# Altium PCB electrodes_only.PcbDoc
Units mm, origin at the board's own origin, x right, y up, seen from the top; angles counter-clockwise.
Board outline 42 x 42 mm, 3 copper layers (Layer 1, Layer 3, Layer 2), stack 1.975 mm thick; 1 components, 45 nets, 5 pads, 0 vias.
Unrouted connection lines stored in the file: 50.
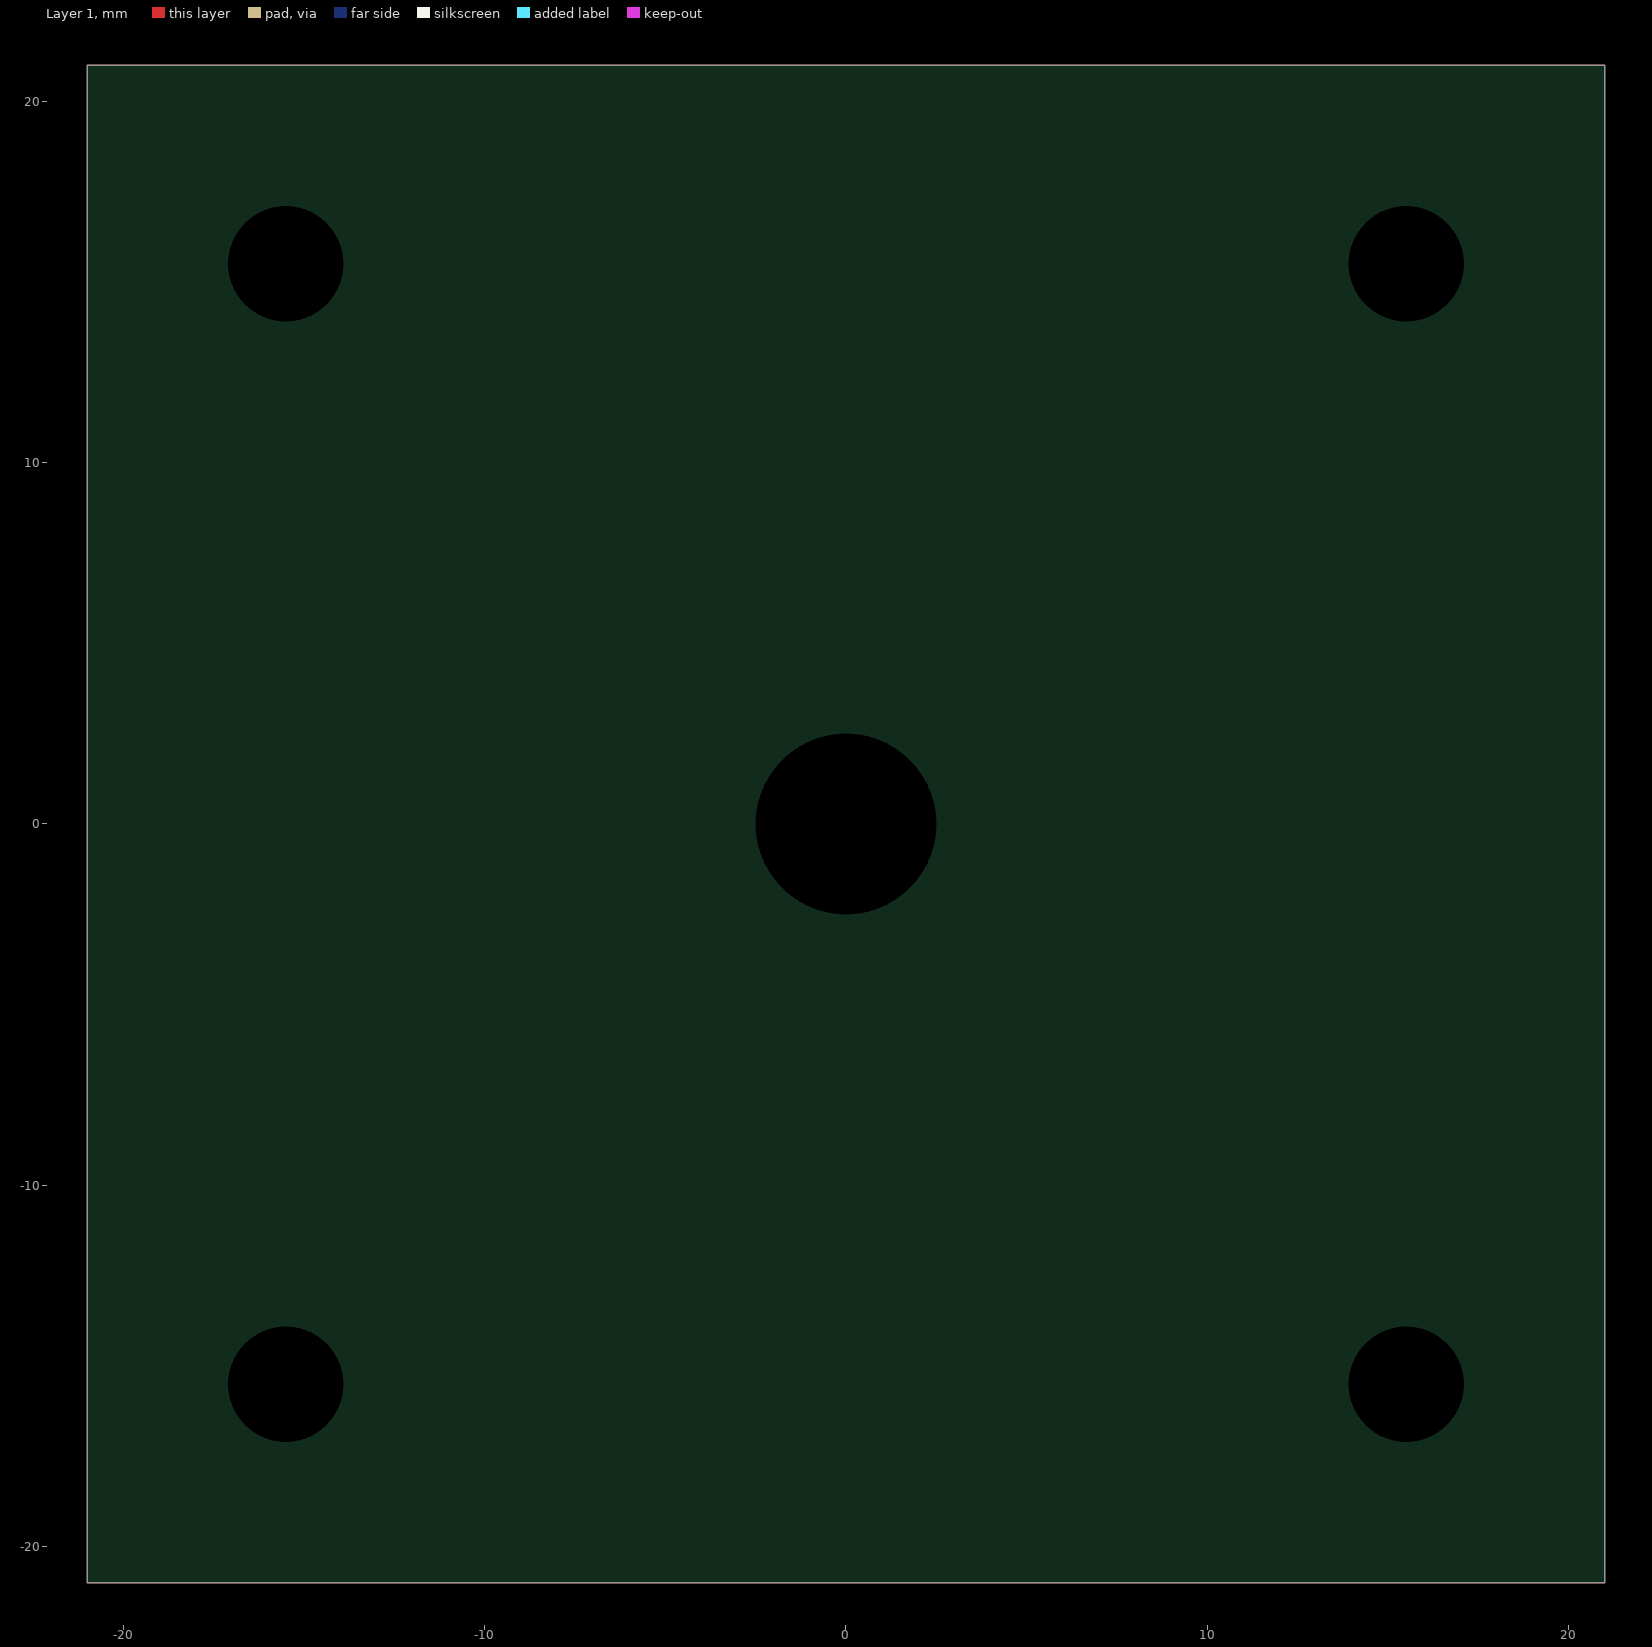
[diagram p0: Layer 1 view]
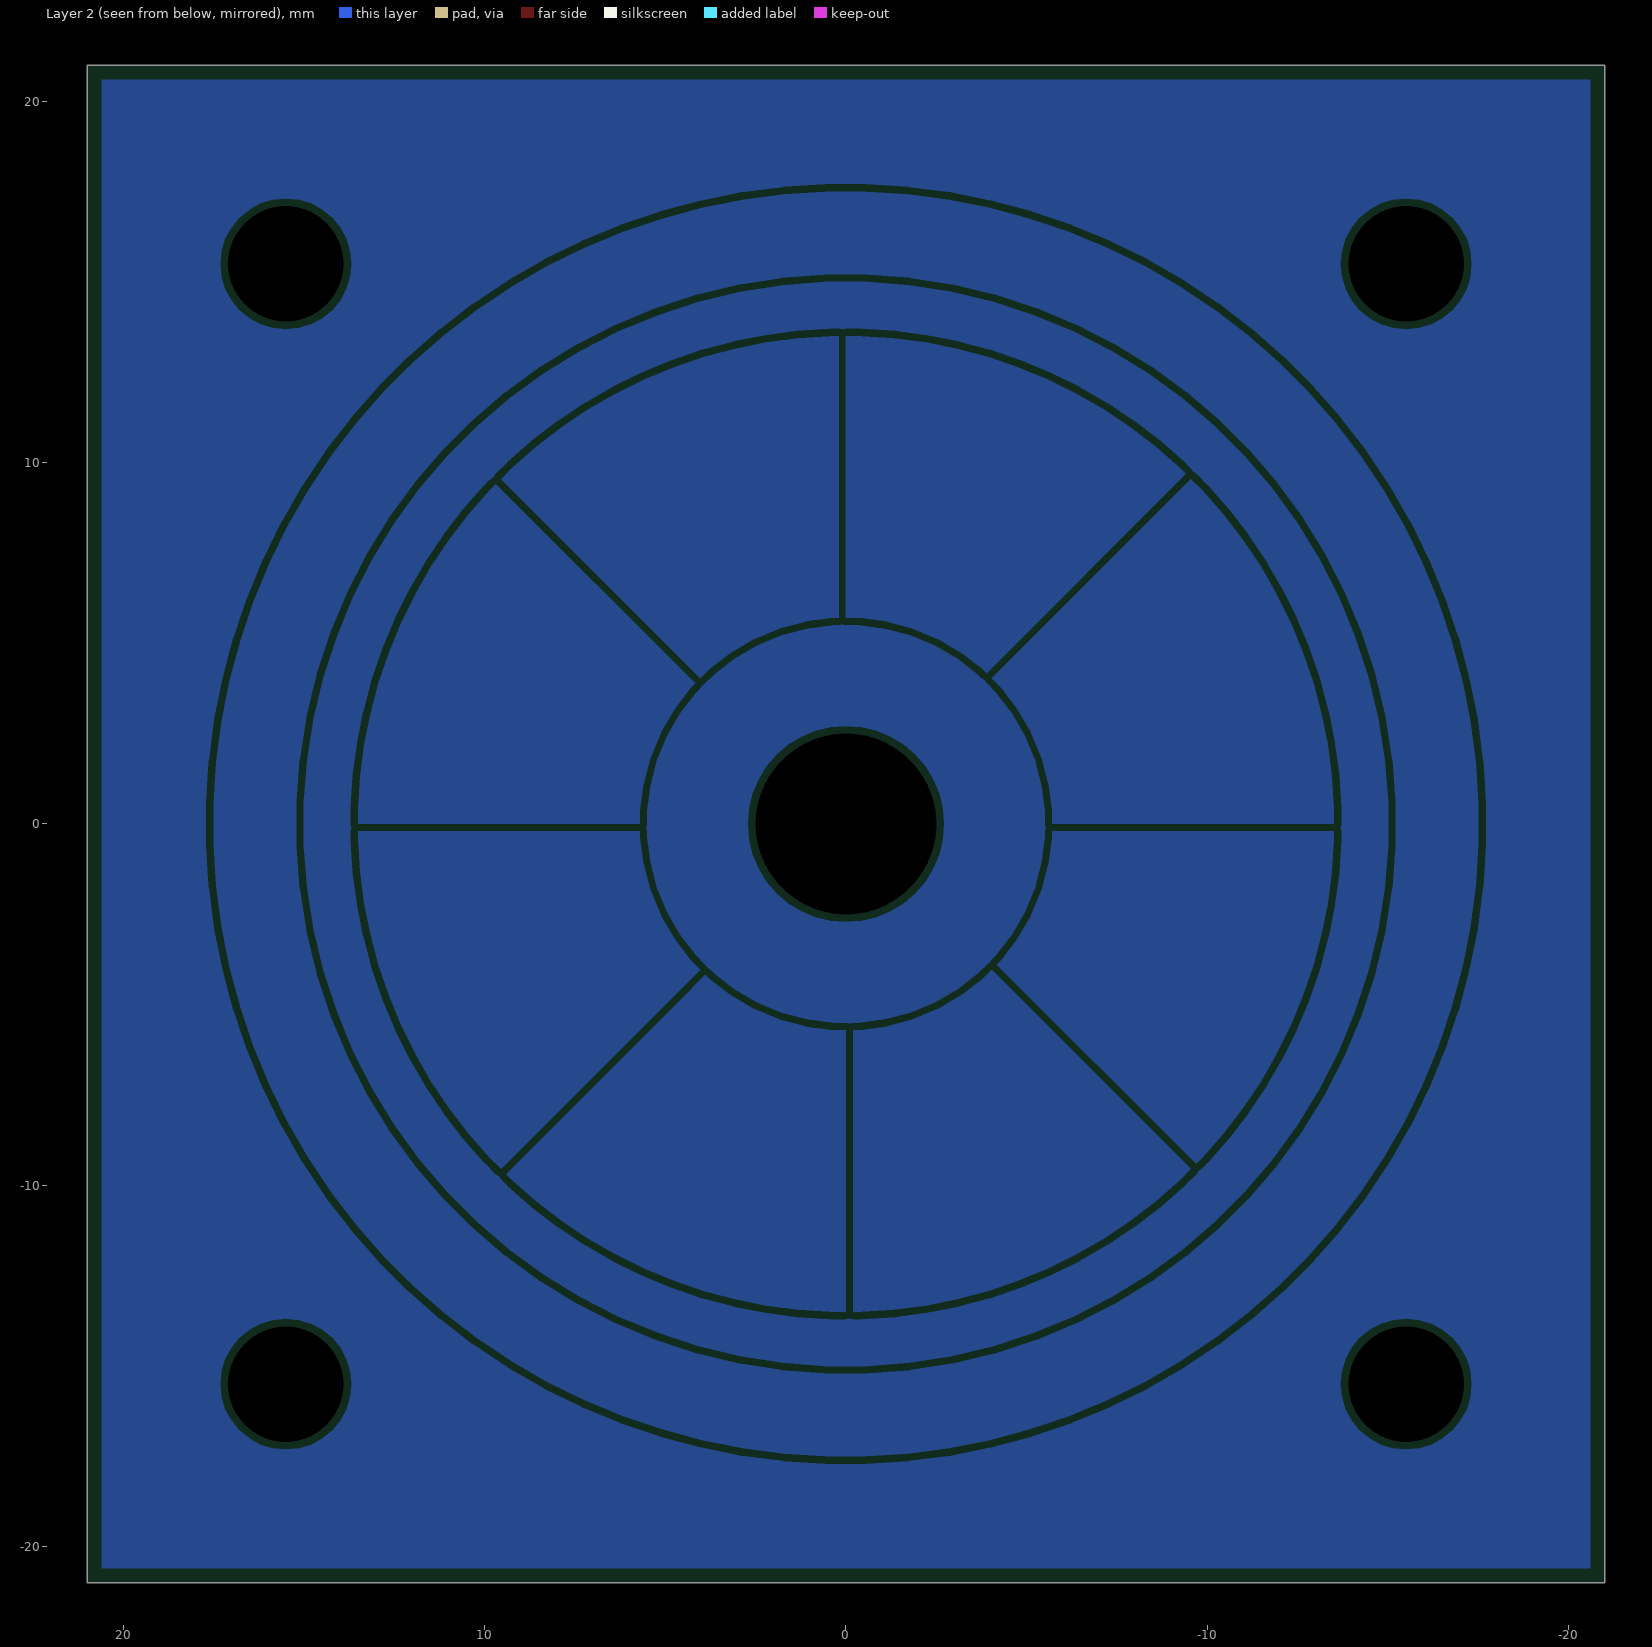
[diagram p1: Layer 2 view, seen from below]
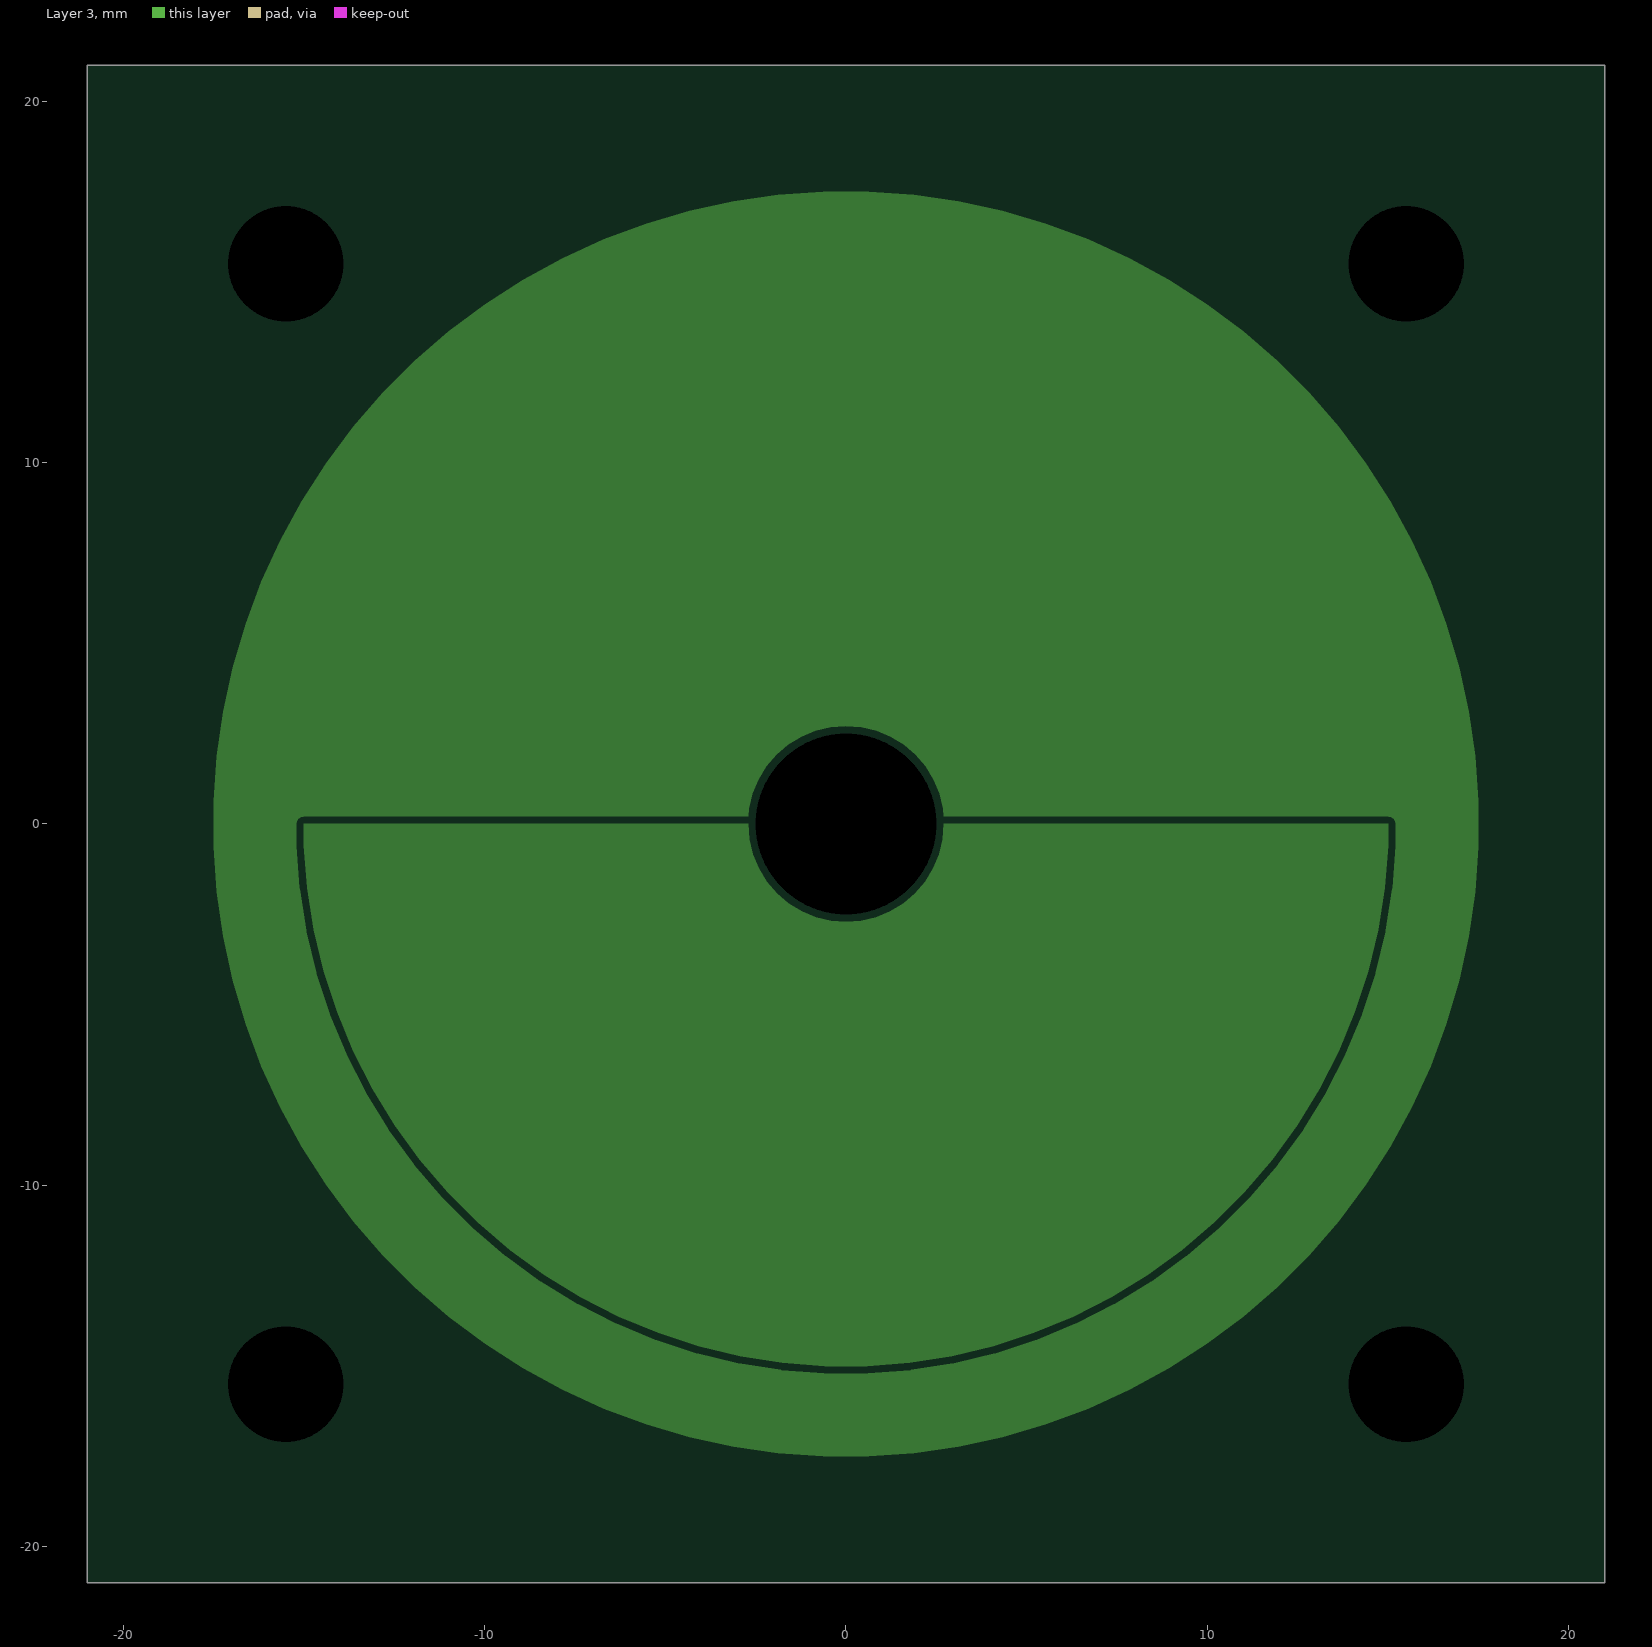
[diagram p2: Layer 3]

## Layer stack, top to bottom
Top Solder: solder mask 0.01, Solder Resist, Dk 3.5
Layer 1: signal copper 0.035
Dielectric1: prepreg 1.55, FR-4, Dk 4.2
Layer 3: signal copper 0.035
Dielectric2: dielectric 0.32, FR-4, Dk 4.8
Layer 2: signal copper 0.035
Bottom Solder: solder mask 0.01, Solder Resist, Dk 3.5

## Board outline
-21,-21 -21,21 21,21 21,-21

## Design rules (kind name [scope] priority, off if disabled: settings)
BoardOutlineClearance [All] p1: gap=0.4 ignorepadtopadclearanceinfootprint=FALSE except(0.1: Text-OutlineEdge Text-CavityEdge Text-CutoutEdge Text-SplitBarrior Text-SplitContinuation)
Clearance [All] p1: gap=0.2 ignorepadtopadclearanceinfootprint=FALSE
ComponentClearance [All] p1: gap=0.2 collisioncheckmode=3 verticalgap=10 showdistances=FALSE
HoleSize [All] p1: absolutevalues=TRUE maxlimit=6.3 minlimit=0.2 maxpercent=80.000 minpercent=20.000
MinimumAnnularRing [All] p1: minimumring=0.076
MinimumSolderMaskSliver [All] p1 off: minsoldermaskwidth=0.1
PlaneConnect [All] p1: pad.planeconnectstyle=Relief pad.reliefexpansion=0.508 pad.reliefentries=4 pad.reliefconductorwidth=0.254 pad.reliefairgap=0.254 via.planeconnectstyle=Direct via.reliefexpansion=0.508 via.reliefentries=4 via.reliefconductorwidth=0.254 via.reliefairgap=0.254
PolygonConnect PolygonConnect_1 [All] p1: thpad.connectstyle=Relief thpad.reliefconductorwidth=0.2 thpad.reliefentries=4 thpad.polygonreliefangle="90 Angle" thpad.airgapwidth=0.2 smdpad.connectstyle=Relief smdpad.reliefconductorwidth=0.2 smdpad.reliefentries=4 smdpad.polygonreliefangle="90 Angle" smdpad.airgapwidth=0.2 via.connectstyle=Direct via.reliefconductorwidth=0.508 via.reliefentries=4 via.polygonreliefangle="90 Angle" via.airgapwidth=0.254
RoutingCorners [All] p1: cornerstyle=Round minsetback=2.5 maxsetback=2.5
RoutingVias [All] p1: holewidth=0.3 width=0.65 viastyle="Through Hole" minholewidth=0.2 minwidth=0.45 maxholewidth=1 maxwidth=2
SilkToSilkClearance [All] p1: silktosilkclearance=0.1
SilkToSolderMaskClearance [IsPad] p1: minsilkscreentomaskgap=0.1 clearancetoexposedcopper=TRUE
SolderMaskExpansion [All] p1: expansion=0 istentingtop=FALSE
UnRoutedNet [All] p1: checkbadconnections=TRUE
Width [All] p1: maxlimit=2.54 minlimit=0.127 preferedwidth=0.2
22 further rules are at their usual default settings.

## Classes and differential pairs
net class R15_Nets: NetC15_2 SIGNAL
net class C27_Nets: GND SIGNAL
net class C26_Nets: +3V3 GND NetU?_3 NetU?_5
net class X2_Nets: GND NetC19_1 NetC20_1
net class X1_Nets: GND NetC17_1 NetC18_1
net class U5_Nets: +3V3 DN1 DP1 GND NetC19_1 NetC20_1 NetR7_2 NetR8_2 NetR9_2 NetR12_1 NetU5_1 NetU5_2 NetU5_11 NetU5_12 NetU5_13 NetU5_14 NetU5_17 NetU5_18 NetU5_20
net class U4_Nets: +3V3 BIAS GND SENSOR
net class U3_Nets: +3V3 ADC_TRIG BIAS BOOT0 GND LED1 LED2 NetC8_1 NetC17_1 NetC18_1 NetTP4_1 NetTP5_1 NetU3_2 NetU3_3 NetU3_4 NetU3_19 NetU3_20 NetU3_21 NetU3_25 NetU3_26 NetU3_39 NetU3_40 NetU3_41 NetU3_45 NetU3_46 NRST PERIOD SIGNAL SPWM1 SPWM2 SPWM3 SPWM4 SPWM5 SPWM6 SPWM7 SPWM8 SWCLK SWDIO TIMEBASE UART1_RX UART1_TX
net class U2_Nets: +3V3 GND NetC15_1 NetC15_2 SENSOR
net class U1_Nets: +3V3 GND VUSB
net class TP8_Nets: PERIOD
net class TP7_Nets: GND
net class TP6_Nets: TIMEBASE
net class TP5_Nets: NetTP5_1
net class TP4_Nets: NetTP4_1
net class TP3_Nets: GND
net class TP1_Nets: SIGNAL
net class TP2_Nets: GND
net class TH8_Nets: GND
net class TH7_Nets: GND
net class TH6_Nets: GND
net class TH5_Nets: SWCLK
net class TH4_Nets: SWDIO
net class TH3_Nets: BOOT0
net class TH2_Nets: NRST
net class TH1_Nets: +3V3
net class R14_Nets: CC1 GND
net class R13_Nets: CC2 GND
net class R12_Nets: NetR12_1 UART1_TX
net class R11_Nets: NetR9_2 UART1_RX
net class R10_Nets: +3V3 UART1_TX
net class R9_Nets: +3V3 NetR9_2
net class R8_Nets: +3V3 NetR8_2
net class R7_Nets: +3V3 NetR7_2
net class R6_Nets: BOOT0 GND
net class R5_Nets: GND NetC15_1
net class R4_Nets: NetC15_1 NetC15_2
net class R3_Nets: +3V3 NetD3_1
net class R2_Nets: +3V3 NetD2_1
net class R1_Nets: +3V3 NetD1_1
net class J1_Nets: CC1 CC2 DN1 DP1 GND NetJ1_3 NetJ1_9 VUSB
net class FB1_Nets: +3V3 NetC8_1
net class D4_Nets: CC1 CC2 DN1 DP1 GND
net class D3_Nets: LED2 NetD3_1
net class D2_Nets: LED1 NetD2_1
net class D1_Nets: GND NetD1_1
net class C25_Nets: CC1 GND
net class C24_Nets: CC2 GND
net class C23_Nets: +3V3 GND
net class C22_Nets: +3V3 GND
net class C21_Nets: +3V3 GND
net class C20_Nets: GND NetC20_1
net class C19_Nets: GND NetC19_1
net class C18_Nets: GND NetC18_1
net class C17_Nets: GND NetC17_1
net class C16_Nets: GND NRST
net class C15_Nets: NetC15_1 NetC15_2
net class C14_Nets: +3V3 GND
net class C13_Nets: +3V3 GND
net class C12_Nets: +3V3 GND
net class C11_Nets: +3V3 GND
net class C10_Nets: GND SENSOR
net class C9_Nets: GND NetC8_1
net class C8_Nets: GND NetC8_1
net class C7_Nets: +3V3 GND
net class C6_Nets: +3V3 GND
net class C5_Nets: +3V3 GND
net class C4_Nets: +3V3 GND
net class C3_Nets: +3V3 GND
net class C2_Nets: GND VUSB
net class C1_Nets: GND VUSB

## Components (designator, comment, footprint, x,y, rotation, side; value= is the part's Value field where it differs from the comment)
LAB1 "S/N Label" SerialNumberLabel_small -48,-73 r0 top

## Footprints (in the part's own frame and the unit in brackets; to place one, negate y for a bottom-side part, rotate by r counter-clockwise, add the part's x,y. Pads: shape width x height; smd on the part's side, far side on the other; paste and mask are expansions set on the pad)
SerialNumberLabel_small [mm] "6.3x6.3mm SerialNumber or Barcode Label"
  silkscreen extent -3.5,-3.5 3.5,3.5, body extent -3.15,-3.15 3.15,3.15, height 0.12

## Free pads (board coordinates)
  round 0 hole 3.2: ""(-15.5,-15.5) ""(-15.5,15.5) ""(15.5,-15.5) ""(15.5,15.5)
  round 0 hole 5 unplated: ""(0,0)

## Nets (pads, with @x,y where several pads share a name; then routed paths per layer and width w, separated by ;. In a path a pad name is that pad's centre, name@x,y a point inside that pad or via, vN(x,y) a via of type N, cw(c..) or ccw(c..) an arc to the next point about the centre after c; other vN are vias at no path point)
+3V3: 
ADC_TRIG: 
BIAS: 
BOOT0: 
CC1: 
CC2: 
DN1: 
DP1: 
GND: 
LED1: 
LED2: 
NetC8_1: 
NetC15_1: 
NetC15_2: 
NetC17_1: 
NetC18_1: 
NetC19_1: 
NetC20_1: 
NetD1_1: 
NetD2_1: 
NetD3_1: 
NetR7_2: 
NetR8_2: 
NetR9_2: 
NetR12_1: 
NetTP4_1: 
NetTP5_1: 
NRST: 
PERIOD: 
SENSOR: 
SIGNAL: 
SPWM1: 
SPWM2: 
SPWM3: 
SPWM4: 
SPWM5: 
SPWM6: 
SPWM7: 
SPWM8: 
SWCLK: 
SWDIO: 
TIMEBASE: 
UART1_RX: 
UART1_TX: 
VUSB: 

## Polygon pours and split planes (outlines as drawn)
no net on Layer 3 "Reflector_Inner" (solid, pour order 10): -15,0 ccw(c0,0) 15,0
no net on Layer 3 "Reflector_Outer" (solid, pour order 11): -17.5,0 ccw(c0,0) 17.5,0 ccw(c0,0)
GND on Layer 2 "GND Plane" (solid, pour order 14): -21,-21 21,-21 21,21 -21,21
SPWM6 on Layer 2 "TX5" (solid, pour order 5): 13.5,0 cw(c0,0) 9.546,-9.546 0,0
SPWM7 on Layer 2 "TX4" (solid, pour order 4): 9.546,9.546 cw(c0,0) 13.5,0 0,0
SPWM8 on Layer 2 "TX3" (solid, pour order 3): 0,13.5 cw(c0,0) 9.546,9.546 0,0
SPWM1 on Layer 2 "TX2" (solid, pour order 2): -9.546,9.546 cw(c0,0) 0,13.5 0,0
SPWM2 on Layer 2 "TX1" (solid, pour order 1): -13.5,0 cw(c0,0) -9.546,9.546 0,0
GND on Layer 2 "Guard inner" (solid, pour order 0): -5.5,0 ccw(c0,0) 0,-5.5 ccw(c0,0) 5.5,0 ccw(c0,0) 0,5.5 ccw(c0,0)
SENSOR on Layer 2 "Receiver" (solid, pour order 12): -17.5,0 ccw(c0,0) 0,-17.5 ccw(c0,0) 17.5,0 ccw(c0,0) 0,17.5 ccw(c0,0)
GND on Layer 2 "Guard outer" (solid, pour order 9): -15,0 ccw(c0,0) 0,-15 ccw(c0,0) 15,0 ccw(c0,0) 0,15 ccw(c0,0)
SPWM3 on Layer 2 "TX8" (solid, pour order 8): -9.546,-9.546 cw(c0,0) -13.5,0 0,0
SPWM4 on Layer 2 "TX7" (solid, pour order 7): 0,-13.5 cw(c0,0) -9.546,-9.546 0,0
SPWM5 on Layer 2 "TX6" (solid, pour order 6): 9.546,-9.546 cw(c0,0) 0,-13.5 0,0
GND on Layer 1 "GND Plane" (solid, remove dead copper, pour order 13): -21,-21 21,-21 21,21 -21,21

## Other copper
Layer 1:
  pour cut-out: 11,-76 11,-79 15,-79 15,-76
  text "'.ProjectNumber''.Revision'" at -19,-71 h1.5
  text "'.Client'" at -19,-74 h1.5
  text "'.Project_Name'" at -19,-77 h1.5
  text "1" at 11.75,-78.25 h1.5
Layer 2:
  pour cut-out: 11,-76 11,-79 15,-79 15,-76
  text "'.ProjectNumber''.Revision'" at 0,-71 h1.5
  text "'.Client'" at 0,-74 h1.5
  text "'.Project_Name'" at 0,-77 h1.5
  text "2" at 13.25,-78.25 h1.5

## Text inside footprints (layer, text, board x,y; h text height)
LAB1: Top Overlay "SN Label" at -50.85,-75.75 h1; Assembly Drawing Top "Serial No." at -50.55,-75.65 h0.8